# EAGLE board FH Charge ECU (EAGLE 8.1.0)
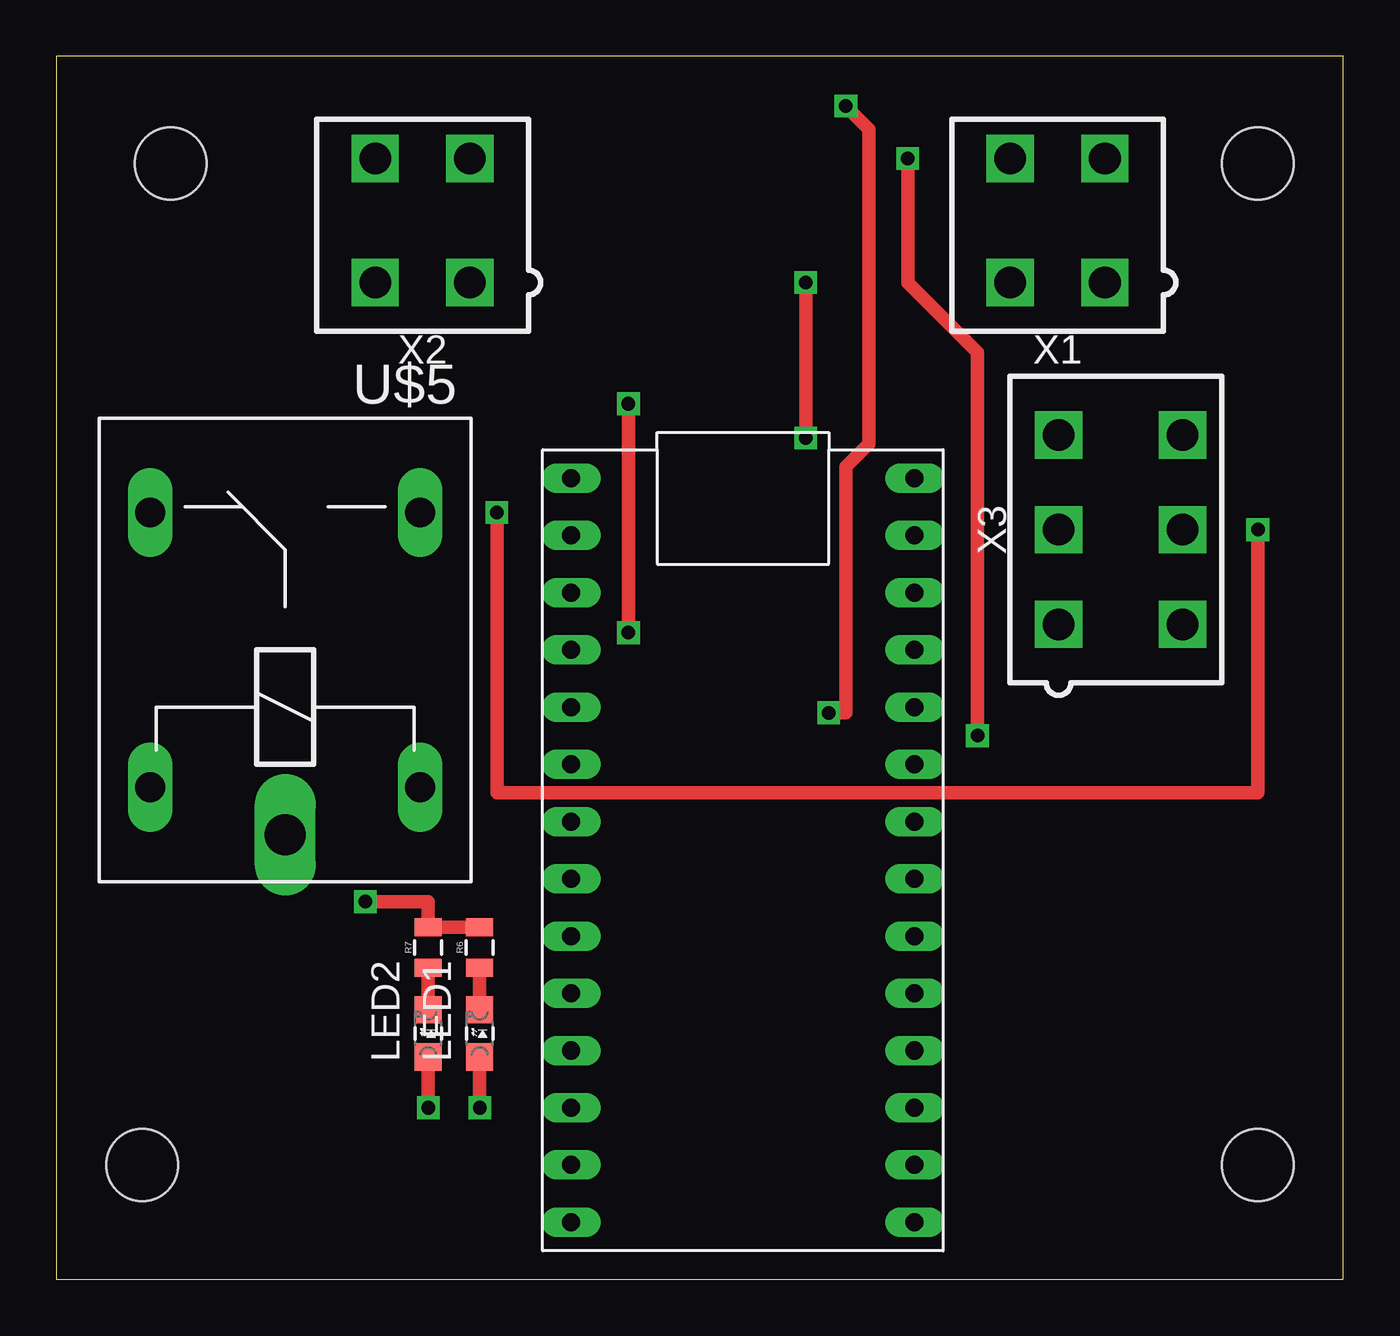
[diagram p0: board, top side]
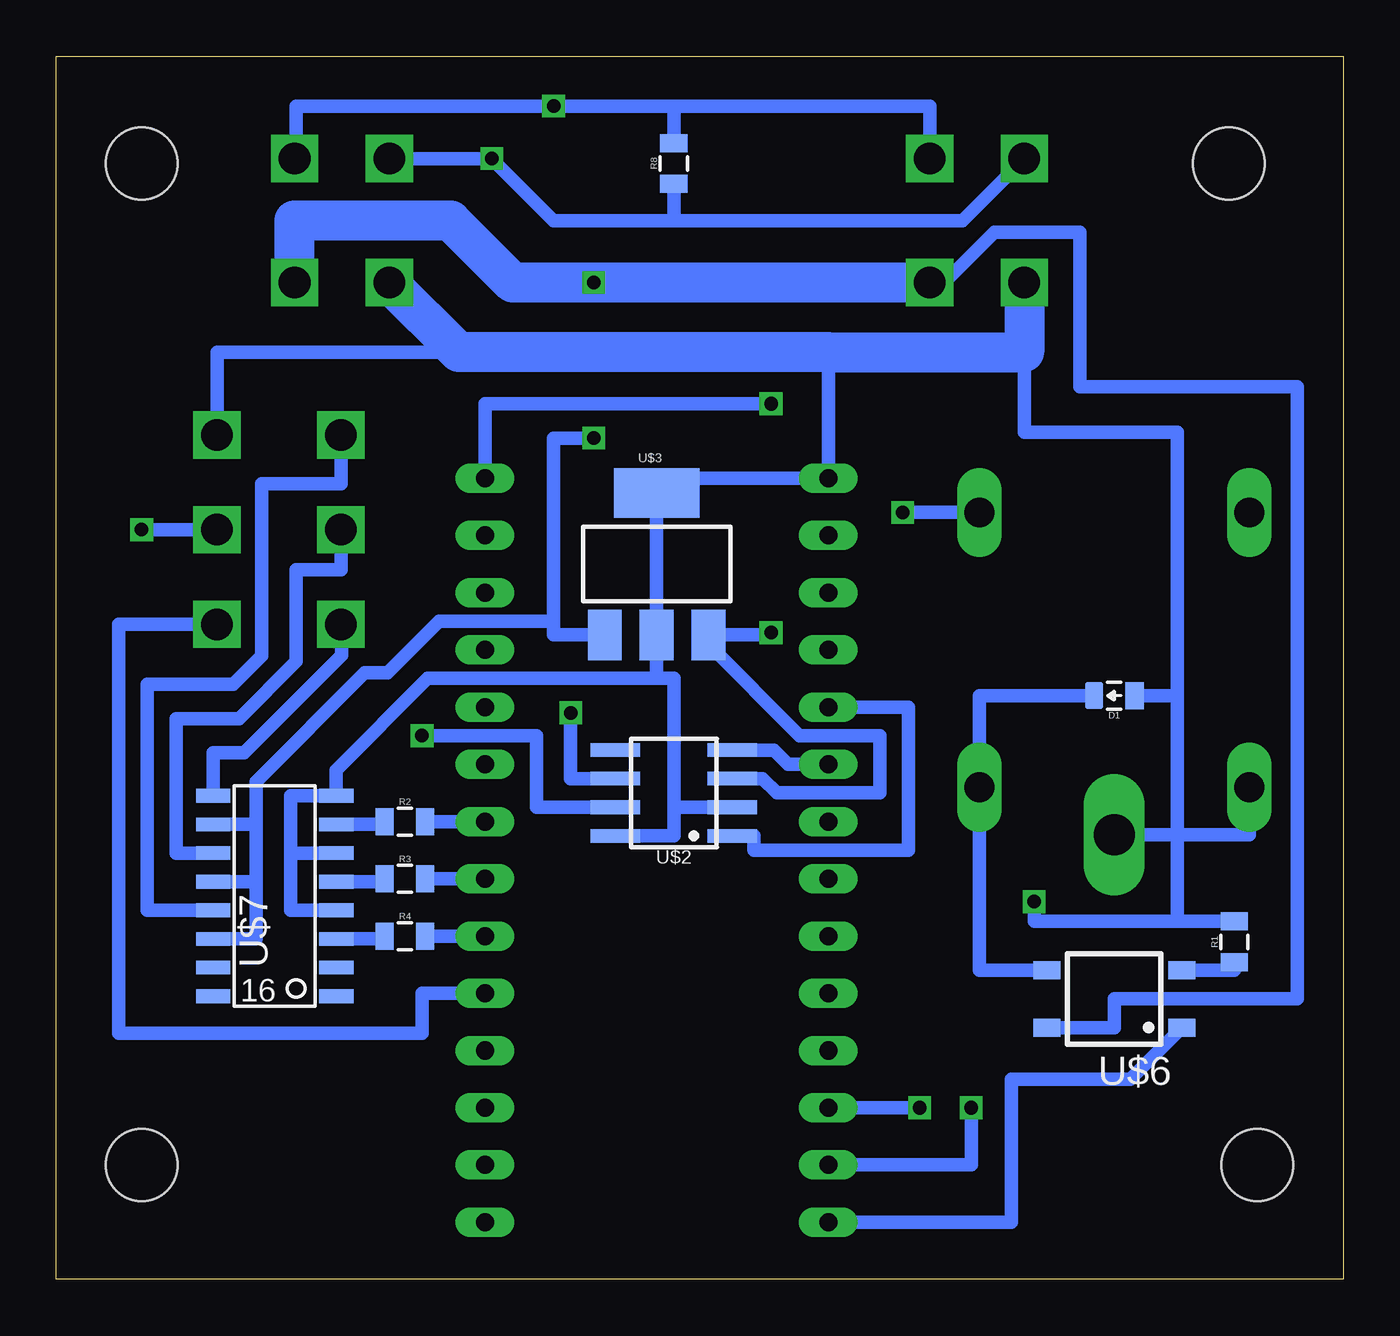
[diagram p1: board, bottom side, seen from below]

Size 57.13 x 54.28 mm. Coordinates in mm from the lower left corner, seen from the top.
Outline: 0,0 57.13,0 57.13,54.28 0,54.28 0,0
Copper layers (1*16): Top 0.035mm / dielectric 1.5mm / Bottom 0.035mm
Design rules "default": minimum track width 10mil, minimum drill 24mil, track to track 8mil, track to pad 8mil, pad to pad 8mil, via to via 8mil, smd to smd 8mil, copper to edge 40mil, drill to drill 8mil, minimum pad ring 10mil, minimum via ring 8mil, stop-mask expansion 4mil, vias tented up to drill 0mil, thermal gap 10mil
Holes 3.2 mm at 5.08,49.53 3.81,5.08 53.34,5.08 53.34,49.53

## Footprints (pad centres in the part's own frame; a part is rotated, then mirrored left to right if it is on the bottom)
0805_D = smd 0.8 x 1.2: A -0.9,0; C 0.9,0
LED-805 = smd 1.2 x 1.2: A 0,-1.05; C 0,1.05
0805 = smd 0.8 x 1.2: 1 -0.9,0; 2 0.9,0
TEENSY_3.2_SIMPLE = drill 0.8 long: 3.3V 16.51,29.21; A0 16.51,3.81; A1 16.51,6.35; A2 16.51,8.89; A3 16.51,11.43; A4 16.51,13.97; A5 16.51,16.51; A6 16.51,19.05; A7 16.51,21.59; A8 16.51,24.13; A9 16.51,26.67; AGND 16.51,31.75; D0(RX1) 1.27,31.75; D1(TX1) 1.27,29.21; D2 1.27,26.67; D3(CANTX) 1.27,24.13; D4(CANRX) 1.27,21.59; D5 1.27,19.05; D6 1.27,16.51; D7(RX3) 1.27,13.97; D8(TX3) 1.27,11.43; D9(RX2) 1.27,8.89; D10(TX2) 1.27,6.35; D11 1.27,3.81; D12 1.27,1.27; D13 16.51,1.27; GND 1.27,34.29; VIN 16.51,34.29
SOIC-08 = smd 0.6 x 2.2: 1 -1.905,-2.6; 2 -0.635,-2.6; 3 0.635,-2.6; 4 1.905,-2.6; 5 1.905,2.6; 6 0.635,2.6; 7 -0.635,2.6; 8 -1.905,2.6
SOT223 = smd 1.5 x 2.235: 1 -2.3,-3.15; 2 0,-3.15; 3 2.3,-3.15 | smd 3.8 x 2.2: 4 0,3.15
ZF112 = drill 1.321 long: 1 4.064,14.884; 2 4.064,2.896; O 16.256,14.884; S 16.256,2.896 | drill 1.803 long: P 1.956,8.89
SOP04 = smd 0.8 x 1.2: 1 -1.27,-3; 2 1.27,-3; 3 1.27,3; 4 -1.27,3
SOIC-16 = smd 0.61 x 1.524: 1 -4.445,-2.794; 2 -3.175,-2.794; 3 -1.905,-2.794; 4 -0.635,-2.794; 5 0.635,-2.794; 6 1.905,-2.794; 7 3.175,-2.794; 8 4.445,-2.794; 9 4.445,2.667; 10 3.175,2.667; 11 1.905,2.667; 12 0.635,2.667; 13 -0.635,2.667; 14 -1.905,2.667; 15 -3.175,2.667; 16 -4.445,2.667
MINIFIT_5566-4 = drill 1.4 square: 1 2.1,-2.75; 2 -2.1,-2.75; 3 2.1,2.75; 4 -2.1,2.75
MINIFIT_5566-6 = drill 1.4 square: 1 4.2,-2.75; 2 0,-2.75; 3 -4.2,-2.75; 4 4.2,2.75; 5 0,2.75; 6 -4.2,2.75

## Placement (x,y rotation side)
D1  DIODE0805  [0805_D]  10.16,25.91 180 bottom
LED1  [LED-805]  18.8,10.92 0 top
LED2  [LED-805]  16.51,10.92 0 top
R1  [0805]  4.83,14.99 90 bottom
R2  [0805]  41.66,20.32 0 bottom
R3  [0805]  41.66,17.78 0 bottom
R4  [0805]  41.66,15.24 0 bottom
R6  [0805]  18.8,14.73 90 top
R7  [0805]  16.51,14.73 90 top
R8  120  [0805]  29.72,49.53 90 bottom
U$1  TEENSY_3.2_SIMPLE  [TEENSY_3.2_SIMPLE]  21.59,1.27 0 top
U$2  MCP2551  [SOIC-08]  29.72,21.59 90 bottom
U$3  [SOT223]  30.48,31.75 0 bottom
U$5  G5LE  [ZF112]  19.05,17.78 90 top
U$6  CPC1002N  [SOP04]  10.16,12.45 90 bottom
U$7  TLP291-4  [SOIC-16]  47.5,17.02 90 bottom
X1  CONNECTOR-4  [MINIFIT_5566-4]  44.45,46.99 0 top
X2  CONNECTOR-4  [MINIFIT_5566-4]  16.26,46.99 0 top
X3  CONNECTOR-6  [MINIFIT_5566-6]  47.24,33.27 270 top

## Library data of the parts
D1 LED1 LED2 R1-R4 R6-R8 U$1-U$3 U$5-U$7 = HyTechDevices
X1 X2 = HyTechDevices; OC_FARNELL: unknown; OC_NEWARK: unknown
X3 = HyTechDevices; MPN: 95566-61002; OC_FARNELL: unknown; OC_NEWARK: 22K8620

## Nets
+12V: U$3.1 U$6.4 U$7.10 U$7.12 U$7.14 X1.1 X2.1
GND: D1.A R1.2 R6.2 R7.2 U$1.GND U$2.2 U$2.8 U$3.2 U$3.4 U$5.1 U$5.P U$7.4 U$7.6 U$7.8 X1.2 X2.2 X3.6
N$1: U$1.A3 X3.4
N$2: U$1.VIN U$2.3 U$3.3
N$3: R8.2 U$2.6 X1.3 X2.3
N$4: R8.1 U$2.7 X1.4 X2.4
N$5: D1.C U$5.2 U$6.3
N$6: U$1.D3(CANTX) U$2.1
N$7: U$1.D4(CANRX) U$2.4
N$8: U$1.D12 U$6.1
N$9: R1.1 U$6.2
N$10: U$7.13 X3.3
N$11: U$5.S X3.5
N$12: U$7.11 X3.2
N$13: U$7.9 X3.1
N$15: R4.2 U$1.A4
N$16: R3.2 U$1.A5
N$17: R2.2 U$1.A6
N$18: R3.1 U$7.5
N$19: R4.1 U$7.3
N$21: R2.1 U$7.7
N$22: LED1.C R6.1
N$23: LED2.C R7.1
N$24: LED1.A U$1.D10(TX2)
N$25: LED2.A U$1.D11

## Tracks (layer width: path | path; a pad name or v marks a point on that pad's centre or on a via)
+12V  (via drill 0.6)
  Top 0.61: v33.27,37.34 v33.27,44.24
  Bottom 0.61: U$3.1 35.05,28.6 35.05,29.21 | 35.05,29.21 35.05,37.34 v33.27,37.34 | 48.26,17.65 48.26,20.19 | 48.26,17.65 48.26,15.11 U$7.14 | U$7.10 48.26,20.19 | U$7.12 48.26,17.65 | 35.05,29.21 40.13,29.21 42.42,26.92 43.43,26.92 48.26,22.1 48.26,20.19 | U$6.4 10.16,11.18 10.16,12.45 2.03,12.45 2.03,39.62 11.68,39.62 11.68,46.48 15.49,46.48 17.74,44.24 X2.1
  Bottom 1.778: X1.1 46.55,46.99 39.62,46.99 36.87,44.24 v33.27,44.24 X2.1
GND  (via drill 0.6)
  Top 0.61: R7.2 R6.2 | 16.51,16 R7.2 | v13.72,16.76 16.51,16.76 R7.2
  Bottom 0.61: 7.37,19.74 U$5.P | 7.37,19.74 4.17,19.74 U$5.1 | 7.37,25.91 D1.A | 7.37,19.74 7.37,25.91 | R1.2 7.37,15.89 | 7.37,15.89 7.37,19.74 | U$2.2 29.72,20.95 | U$2.8 29.72,19.68 29.72,20.95 | X3.6 49.99,41.15 39.26,41.15 | 22.86,41.15 U$1.GND 30.48,35.56 U$3.4 U$3.2 30.48,26.67 | U$7.4 46.74,16.38 46.74,18.92 | 46.74,18.92 U$7.6 | 46.74,18.92 46.74,21.46 U$7.8 44.7,22.61 40.64,26.67 30.48,26.67 | 29.72,20.95 29.72,26.67 30.48,26.67 | 14.16,41.15 14.16,37.59 7.37,37.59 7.37,25.91 | v13.72,16.76 13.72,15.89 7.37,15.89
  Bottom 1.778: X1.2 39.26,41.15 22.86,41.15 14.16,41.15 X2.2
N$1
  Bottom 0.61: X3.4 54.36,29.07 54.36,10.92 40.89,10.92 40.89,12.7 U$1.A3
N$2  (via drill 0.6)
  Top 0.61: v25.4,38.86 v25.4,28.7
  Bottom 0.61: U$2.3 25.78,22.23 25.15,21.59 20.57,21.59 20.57,24.13 24.13,24.13 28.18,28.18 U$3.3 25.4,28.6 v25.4,28.7 | v25.4,38.86 38.1,38.86 U$1.VIN
N$3  (via drill 0.6)
  Top 0.61: v35.05,52.07 36.07,51.05 36.07,37.08 35.05,36.07 35.05,25.15 v34.29,25.15
  Bottom 0.61: X2.3 18.36,52.07 29.72,52.07 | X1.3 46.48,49.74 46.48,52.07 v35.05,52.07 29.72,52.07 | R8.2 29.72,52.07 | U$2.6 34.29,22.23 v34.29,25.15
N$4  (via drill 0.6)
  Top 0.61: v40.89,24.13 40.89,41.15 37.8,44.24 v37.8,49.74
  Bottom 0.61: X1.4 v37.8,49.74 35.05,46.99 29.72,46.99 | R8.1 29.72,46.99 | v40.89,24.13 35.81,24.13 35.81,20.95 U$2.7 | X2.4 16.91,46.99 29.72,46.99
N$5
  Bottom 0.61: D1.C 16.15,25.91 U$5.2 16.15,13.72 U$6.3
N$6
  Bottom 0.61: U$1.D3(CANTX) 19.3,25.4 19.3,19.05 26.16,19.05 26.16,19.68 U$2.1
N$7
  Bottom 0.61: U$1.D4(CANRX) 24.64,22.86 25.27,23.5 U$2.4
N$8
  Bottom 0.61: U$6.1 9.45,8.89 14.73,8.89 14.73,2.54 U$1.D12
N$9
  Bottom 0.61: U$6.2 4.83,13.72 R1.1
N$10
  Bottom 0.61: X3.3 44.49,35.31 48.01,35.31 48.01,27.69 49.28,26.42 53.09,26.42 53.09,16.38 U$7.13
N$11  (via drill 0.6)
  Top 0.61: v53.34,33.27 53.34,21.59 19.56,21.59 v19.56,34.04
  Bottom 0.61: X3.5 v53.34,33.27 | v19.56,34.04 U$5.S
N$12
  Bottom 0.61: X3.2 44.49,31.5 46.48,31.5 46.48,27.43 49.02,24.89 51.82,24.89 51.82,18.92 U$7.11
N$13
  Bottom 0.61: U$7.9 50.16,23.37 48.79,23.37 44.46,27.7 44.46,29.04 X3.1
N$15
  Bottom 0.61: R4.2 U$1.A4
N$16
  Bottom 0.61: R3.2 U$1.A5
N$17
  Bottom 0.61: R2.2 U$1.A6
N$18
  Bottom 0.61: U$7.5 42.56,17.65 R3.1
N$19
  Bottom 0.61: U$7.3 42.56,15.11 R4.1
N$21
  Bottom 0.61: U$7.7 42.56,20.19 R2.1
N$22
  Top 0.61: LED1.C R6.1
N$23
  Top 0.61: R7.1 LED2.C
N$24  (via drill 0.6)
  Top 0.61: LED1.A v18.8,7.62
  Bottom 0.61: v18.8,7.62 U$1.D10(TX2)
N$25  (via drill 0.6)
  Top 0.61: LED2.A v16.51,7.62
  Bottom 0.61: v16.51,7.62 16.51,5.08 U$1.D11